# Altium PCB ASCII Terminal.PcbDoc
Units mil, origin at the board's own origin, x right, y up, seen from the top; angles counter-clockwise.
Board outline 4875 x 1475 mil, 2 copper layers (Top Layer, Bottom Layer), stack 61.8 mil thick; 40 components, 35 nets, 192 pads, 62 vias.
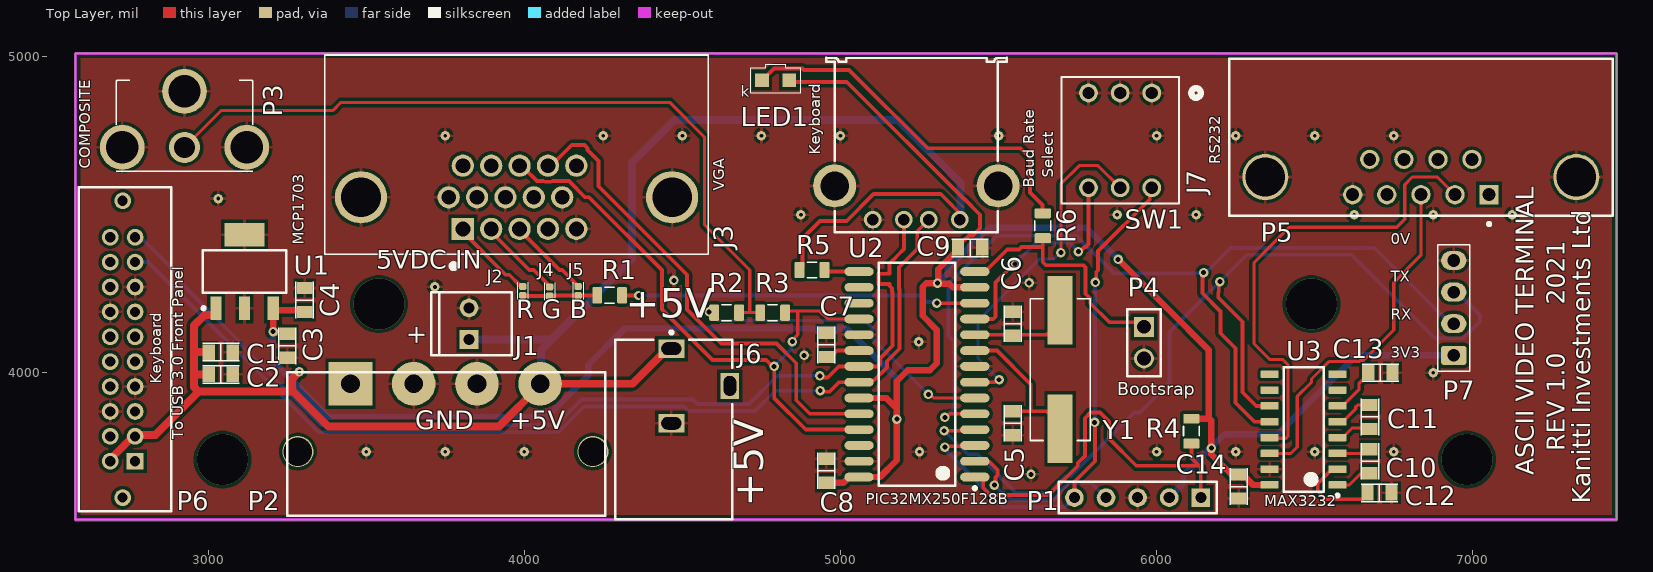
[diagram p0: Top Layer view]
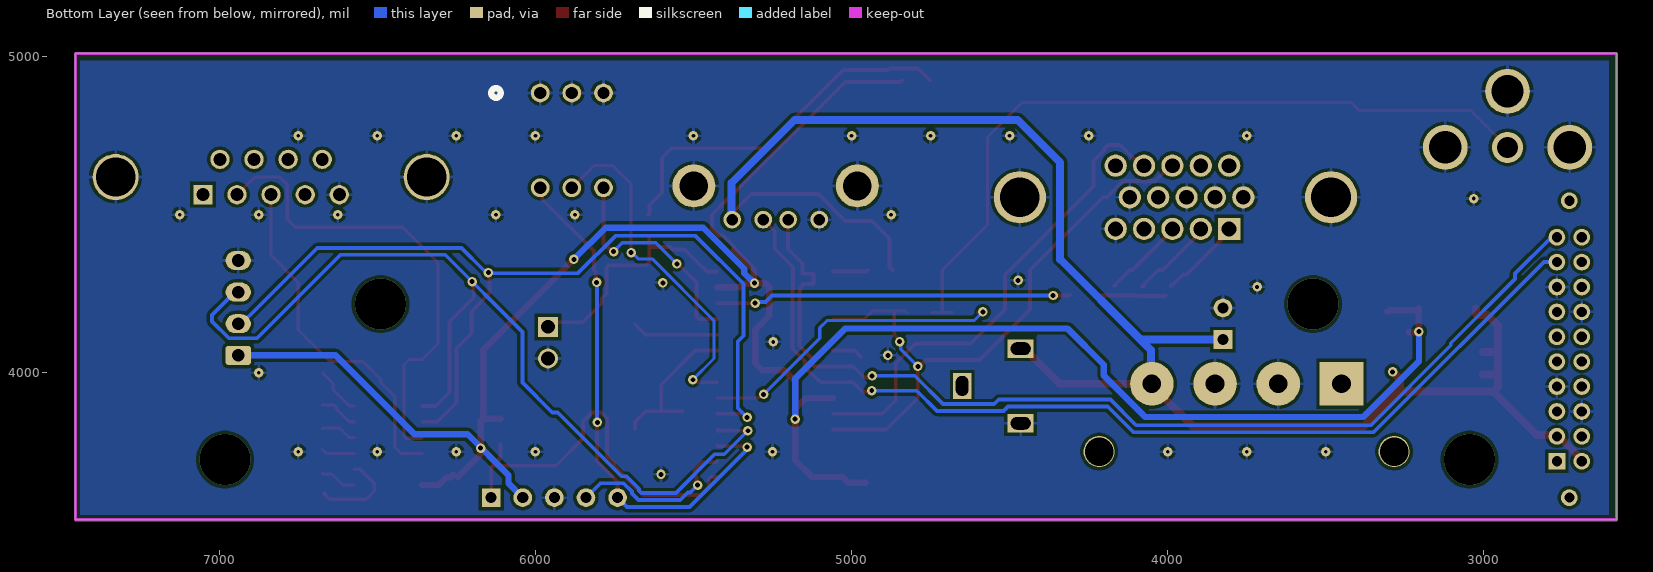
[diagram p1: Bottom Layer view, seen from below]
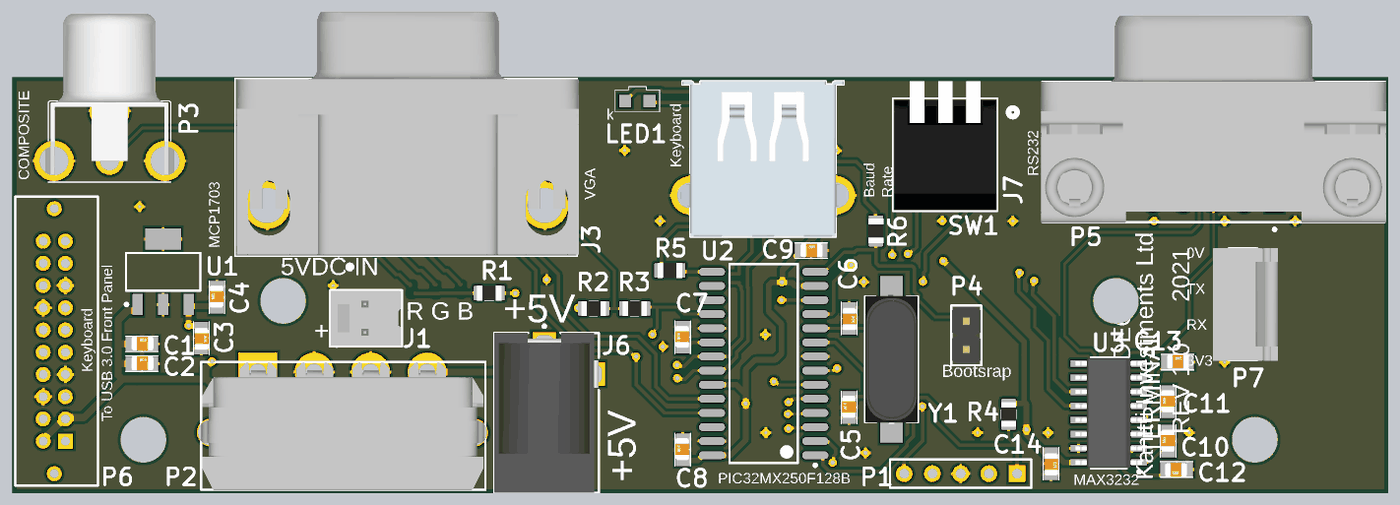
[diagram p2: 3D render of the assembled board from above, using the file's embedded part models]

## Layer stack, top to bottom
Top Solder: solder mask 0.4, Solder Resist, Dk 3.5
Top Layer: signal copper 1.4
Dielectric 1: dielectric 59, FR-4, Dk 4.8
Bottom Layer: signal copper 1.4
Bottom Solder: solder mask 0.4, Solder Resist, Dk 3.5

## Board outline
2580,3535 7455,3535 7455,5010 2580,5010

## Design rules (kind name [scope] priority, off if disabled: settings)
Clearance [All] p1: gap=10 ignorepadtopadclearanceinfootprint=FALSE except(0: Arc-Hole Track-Hole SMDPad-Hole THPad-Hole Via-Hole Fill-Hole Poly-Hole Region-Hole Text-Hole)
PolygonConnect [All] p1: connectstyle=Relief reliefconductorwidth=10 reliefentries=4 polygonreliefangle="90 Angle" airgapwidth=10
RoomDefinition "AScii Terminal" [InComponentClass('AScii Terminal')] p1: confinementstyle=ConfineIn formatcopy=TRUE lockcomponents=FALSE outline 7175,1060 12365,1060 12365,3125 7175,3125
RoutingVias [All] p1: holewidth=28 width=50 viastyle="Through Hole" minholewidth=28 minwidth=50 maxholewidth=28 maxwidth=50
SolderMaskExpansion [All] p1: expansion=4 istentingtop=FALSE
Width [All] p1: maxlimit=100 minlimit=10 preferedwidth=10
30 further rules are at their usual default settings.

## Components (designator, comment, footprint, x,y, rotation, side; value= is the part's Value field where it differs from the comment)
C1 "VJ0805V475ZXQTW1BC" C0805-S 3040,4065 r0 top value=10
C2 "VJ0805V475ZXQTW1BC" C0805-S 3040,3995 r0 top value=0.1
C3 "VJ0805V475ZXQTW1BC" C0805-S 3250,4085 r270 top value=0.1
C4 "VJ0805V475ZXQTW1BC" C0805-S 3305,4230 r90 top value=10
C5 "18p" C0805-S 5545,3840 r90 top
C6 "18p" C0805-S 5545,4155 r270 top
C7 "VJ0805V475ZXQTW1BC" C0805-S 4955,4088 r90 top value=10
C8 "VJ0805V475ZXQTW1BC" C0805-S 4955,3690 r90 top value=0.1
C9 "VJ0805V475ZXQTW1BC" C0805-S 5410,4395 r0 top value=0.1
C10 "VJ0805V475ZXQTW1BC" C0805-S 6675,3720 r90 top value=0.1
C11 "VJ0805V475ZXQTW1BC" C0805-S 6675,3860 r90 top value=0.1
C12 "VJ0805V475ZXQTW1BC" C0805-S 6705,3620 r180 top value=0.1
C13 "VJ0805V475ZXQTW1BC" C0805-S 6708,4000 r0 top value=0.1
C14 "VJ0805V475ZXQTW1BC" C0805-S 6260,3640 r270 top value=0.1
J1 "HDR2" "HDR1X2 - KK" 3825,4105 r90 top
J2 "SOLDER JUMPER" "SOLDER JUMPER" 1151.11,6726.83 r90 top
J3 "2311763-1" TE_1-1734530-1 3975.35,4555 r180 top locked
J4 "SOLDER JUMPER" "SOLDER JUMPER" 1236.11,6725.25 r90 top
J5 "SOLDER JUMPER" "SOLDER JUMPER" 1326.11,6726.83 r90 top
J6 "PJ-102B" CUI-PJ-102B_V 4465,3958.11 r270 top
J7 "61400416021" 61400416021 5240,4720 r180 top
LED1 "LED RED R/A" LTST-S270 4795,4925 r90 top
P1 "Header 5" HDR1X5 6140,3605 r180 top
P2 "Header 2" 1745521 3450,3965 r90 top
P3 "RS153(G)" RCAJ-01X 2925,4890 r0 top
P4 "61300211121" 61300211121 5960,4095 r270 top
P5 "5747840-4" TECO-5747840-4_V 6836.06,4619.09 r180 top
P6 "T2M-110-01-L-D-TH-WT" SMTC-T2M-110-01-X-D-TH-WT 2768.74,3720.04 r90 top
P7 "Programmer" HDR1X4_2.54mmp 6940,4055 r90 top
R1 "150" RESC2012X70N 4270,4245 r0 top
R2 "150" RESC2012X70N 4640,4190 r180 top
R3 "470" RESC2012X70N 4785.63,4190 r0 top
R4 "4K7" RESC2012X70N 6110,3815 r90 top
R5 "4K7" RESC2012X70N 4910,4325 r180 top
R6 "82" RESC2012X70N 5640,4465 r270 top
SW1 "A6FR-3104" SW_A6FR-3104_OMR 5784.69,4585 r270 top
U1 "MCP1703T-3302E/DB" SOT-223-DB3_L 3115,4320 r90 top
U2 "PIC32MX250F128B-I/SO" MCHP-SOIC-SO28_M 5241.93,3995 r180 top locked
U3 "MAX3232EIDR" D0016A_N 6465,3820 r180 top
Y1 "9C-8.000MEEJ-T" XTAL_9C-8.000MEEJ-T 5695,4010 r270 top locked

## Footprints (in the part's own frame and the unit in brackets; to place one, negate y for a bottom-side part, rotate by r counter-clockwise, add the part's x,y. Pads: shape width x height; smd on the part's side, far side on the other; paste and mask are expansions set on the pad)
1745521 [mm] "4PIN RA 5.08 TH CONN DISK DRIVE"
  rect 3.5x3.5 hole 1.5: 1(0,0)
  round 3.5 hole 1.5: 2(0,-5.08) 3(0,-10.16) 4(0,-15.24)
  round 2.5 hole 2.3: ""(-5.45,4.23) ""(-5.45,-19.473)
  silkscreen extent -10.59,-20.49 0.91,5.09, body extent -10.64,-20.4 0.88,5.08, height 9.43
61300211121 [mm] "Pin Header, pitch 2.54 mm, THT, Vertical, single row, 2p"
  rect 1.6x1.6 hole 1.1: 1(-1.27,0)
  round 1.6 hole 1.1: 2(1.27,0)
  silkscreen extent -2.69,-1.35 2.69,1.35, body extent -2.54,-1.27 2.54,1.27, height 8.57
61400416021 [mm] "USB 2.0 Type A Horizontal"
  round 1.42 hole 0.92: 1(-3.5,5.99) 2(-1,5.99) 3(1,5.99) 4(3.5,5.99)
  round 3.45 hole 2.3: Shell(-6.57,3.28) Shell(6.57,3.28)
  silkscreen extent -7.25,-7 7.25,7, body extent -8,-7 8,7, height 7.63
C0805-S [mil]
  rect 39x49 smd: 1(-38,0) 2(38,0)
  silkscreen extent -58,-28 58,28, body extent -37,-24 41,26, height 31
CUI-PJ-102B_V [mm] "THD, 3-Leads, Body 14.4x9mm, Height 11mm"
  rect 1.5x2.1 hole 1 slot 1.6 at 90 deg: 1(-3,0) 2(3,0)
  rect 2.1x1.5 hole 1 slot 1.6 at 0 deg: 3(0,4.7)
  silkscreen extent -4.42,-4.5 10.7,4.9, body extent -3.7,-4.5 10.7,4.9, height 11
D0016A_N [mm] "SOIC, 16-Leads, Body 10x4mm, Pitch 1.27mm, IPC Medium Density"
  rrect17% 1.45x0.6 smd: 1(-2.725,4.445) 2(-2.725,3.175) 3(-2.725,1.905) 4(-2.725,0.635) 5(-2.725,-0.635) 6(-2.725,-1.905) 7(-2.725,-3.175) 8(-2.725,-4.445) 9(2.725,-4.445) 10(2.725,-3.175) 11(2.725,-1.905) 12(2.725,-0.635) 13(2.725,0.635) 14(2.725,1.905) 15(2.725,3.175) 16(2.725,4.445)
  silkscreen extent -2.85,-5 1.6,5.42, body extent -3,-4.95 3,4.95, height 1.59
"HDR1X2 - KK" [mm] "Connector; Header; 2 Position"
  rect 1.5x1.5 hole 0.9: 1(0,0)
  round 1.5 hole 0.9: 2(2.54,0)
  silkscreen extent -1.28,-3.45 3.81,3.05, body extent -1.17,-3.38 3.75,2.97, height 10.68
HDR1X4_2.54mmp [mil] "Connector; Header; 4 Position 0.100\" pitch"
  rrect25% 60x80 hole 40: 1(0,0)
  oval 60x80 hole 40: 2(100,0) 3(200,0) 4(300,0)
  silkscreen extent -50,-50 350,50, body extent -50,-125 350,105, height 395
HDR1X5 [mm] "Connector; Header; 5 Position"
  rect 1.5x1.5 hole 0.9: 1(0,0)
  round 1.5 hole 0.9: 2(2.54,0) 3(5.08,0) 4(7.62,0) 5(10.16,0)
  silkscreen extent -1.27,-1.27 11.43,1.27
LTST-S270 [mm]
  rect 1.1x1.1 smd: A(0,-1.1) K(0,1.1)
  silkscreen extent -1,-2 1.3,2, body extent -0.35,-0.85 0.85,0.85, height 0.6
MCHP-SOIC-SO28_M [mm] "SOIC, 28-Leads, Body 17.9x7.5mm, Pitch 1.27mm, IPC Low Density"
  oval 2.35x0.7 smd: 1(-4.65,8.255) 2(-4.65,6.985) 3(-4.65,5.715) 4(-4.65,4.445) 5(-4.65,3.175) 6(-4.65,1.905) 7(-4.65,0.635) 8(-4.65,-0.635) 9(-4.65,-1.905) 10(-4.65,-3.175) 11(-4.65,-4.445) 12(-4.65,-5.715) 13(-4.65,-6.985) 14(-4.65,-8.255) 15(4.65,-8.255) 16(4.65,-6.985) 17(4.65,-5.715) 18(4.65,-4.445) 19(4.65,-3.175) 20(4.65,-1.905) 21(4.65,-0.635) 22(4.65,0.635) 23(4.65,1.905) 24(4.65,3.175) 25(4.65,4.445) 26(4.65,5.715) 27(4.65,6.985) 28(4.65,8.255)
  silkscreen extent -4.78,-8.95 3.08,9.28, body extent -3.75,-8.95 3.75,8.95, height 2.65
RCAJ-01X [mm]
  round 3.6 hole 2.6: 1(-5,-4.5) 1(0,0) 1(5,-4.5)
  round 2.5 hole 1.7: 2(0,-4.5)
  silkscreen extent -5.5,-6.4 5.5,0.9, body extent -5.8,-5.75 5.8,8.75, height 11.9
RESC2012X70N [mm] "Chip Resistor, Body 2.0x1.2mm, EIA 0805, IPC Medium Density"
  round 0.254 on Mech15: 0(0,0)
  rrect25% 0.8x1.3 smd: 1(-1,0) 2(1,0)
  Top Layer pour cut-out: -0.725,0.65 -0.525,0.85 0.525,0.85 0.725,0.65 0.725,-0.65 0.525,-0.85 -0.525,-0.85 -0.725,-0.65
  silkscreen extent -0.38,-0.63 0.38,0.64, body extent -1.1,-0.67 1.1,0.68, height 0.69
SMTC-T2M-110-01-X-D-TH-WT [mm] "Shrouded Terminal Strip, 2x10 Pins, Vertical, 2mm Pitch, Male"
  rect 1.35x1.35 hole 0.813: 1(0,0)
  round 1.35 hole 0.813: 2(0,2) 3(2,0) 4(2,2) 5(4,0) 6(4,2) 7(6,0) 8(6,2) 9(8,0) 10(8,2) 11(10,0) 12(10,2) 13(12,0) 14(12,2) 15(14,0) 16(14,2) 17(16,0) 18(16,2) 19(18,0) 20(18,2) MH1(-2.925,1) MH2(20.925,1)
  silkscreen extent -4,-2.92 22,4.52
"SOLDER JUMPER" [mm]
  rrect50% 0.55x0.6 smd: 1(-63.06,-72.23) 2(-62.33,-72.23)
  Top Layer pour cut-out: -63.46,-72.54 -63.06,-72.54 -63.06,-71.94 -63.46,-71.94
  silkscreen extent -63.41,-72.64 -61.99,-71.83
SOT-223-DB3_L [mm] "SOT223, 4-Leads, Body 6.5x3.5mm, Pitch 2.3mm, Lead Span 7mm, IPC High Density"
  rect 1.9x0.9 smd: 1(-2.95,2.3) 2(-2.95,0) 3(-2.95,-2.3)
  rect 1.9x3.2 smd: 4(2.95,0)
  silkscreen extent -3.07,-3.35 1.7,3.42, body extent -1.85,-3.35 1.85,3.35, height 1.8
SW_A6FR-3104_OMR [mil]
  round 59.37 hole 39 mask+0: 1(-300,200) 2(-300,100) 3(-300,0) 4(0,0) 5(0,100) 6(0,200)
  silkscreen extent -350,-86 50,355, body extent -410,-80 47,281, height 402
TE_1-1734530-1 [mm]
  rect 1.785x1.785 hole 1.19: 1(4.315,2.54)
  round 1.785 hole 1.19: 2(2.035,2.54) 3(-0.245,2.54) 4(-2.525,2.54) 5(-4.805,2.54) 6(5.455,0) 7(3.175,0) 8(0.895,0) 9(-1.385,0) 10(-3.665,0) 11(4.315,-2.54) 12(2.035,-2.54) 13(-0.245,-2.54) 14(-2.525,-2.54) 15(-4.805,-2.54)
  round 4.196 hole 3.18: SH1(-12.5,0) SH2(12.5,0)
  silkscreen extent -15.4,-11.43 15.4,5.73, body extent -15.56,-17.38 15.24,4.42, height 11.38
TECO-5747840-4_V [mm] "THD, 9-Leads, Body 30.81x18.62mm, Pitch 1.37mm"
  rect 1.55x1.55 hole 1.04: 1(-5.48,1.42)
  round 1.55 hole 1.04: 2(-2.74,1.42) 3(0,1.42) 4(2.74,1.42) 5(5.48,1.42) 6(-4.11,-1.42) 7(-1.37,-1.42) 8(1.37,-1.42) 9(4.11,-1.42)
  round 3.7 hole 3.17: MH1(-12.495,0) MH2(12.495,0)
  silkscreen extent -15.41,-9.52 15.41,3.9, body extent -15.52,-15.42 15.52,3.19, height 12.27
XTAL_9C-8.000MEEJ-T [mm]
  rect 5.5x2 smd: 1(-4.75,0) 2(4.75,0)
  silkscreen extent -5.7,-2.4 5.7,2.4, body extent -5.81,-2.35 5.8,2.35, height 4.2

## Part data
C1 C2 C3 C4 C5 C6 C7 C8 C9 C10 C11 C12 C13 C14: library part CAP, "Capacitor"
  C1 C4 C7: P/N=LMK212ABJ106KG-T
  C2 C3 C8 C9 C10 C11 C12 C13 C14: P/N=UMK212BJ104KG-T
  C5 C6: P/N=VJ0805A180FXXCW1BC
J1: library part Header2P, "Header, 2-pin", P/N=0022232021
J3: library part 2311763-2, "15 Position D-Sub, High Density Receptacle, Female Sockets Connector", Package=None, MF="TE Connectivity", MP=1-1734530-1, P/N=2311763-2, Price=None, SnapEDA_Link=https://www.snapeda.com/parts/1-1734530-1/TE%20Connectivity%20AMP%20Connectors/view-part/289078/?ref=snap, TE_purchase_URL=https://www.te.com/usa-en/product-1-1734530-1.html?te_bu=Cor&te_type=disp&te_campaign=seda_glo_cor-seda-global-disp-prtnr-fy19-seda-model-bom-cta_sma-317_1&elqCampaignId=32493
J6: library part CMP-2000-06900-1, "Through Hole Right Angle DC Power Jack, 2.5 A, 2.5 mm Center Pin, 3 Position, -25 to 85 degC, RoHS, Bulk", Current Rating=2.5A, Flammability Rating=UL94V-0, Insulation Resistance=100MOhms, Manufacturer=CUIInc., Operating Temperature Range=-25Cto+85C, Package Description="3-Pin Through Hole Device, Body 14.4 x 9 mm, Height 11 mm", Voltage Rating=24V, Brand=CUI, Connector Type=DCPowerJack, Contact Gender=Male, Contact Material=Copper, Contact Plating=Nickel, Datasheet URL=http://www.cui.com/product/resource/pj-102b.pdf, Datasheet Version="Rev. 1.03, 04/2016", Factory Pack Quantity=280, Housing Material=PolybutyleneTerephthalate(PBT), Inside Contact Diameter=2.5mm, Manufacturer URL=http://www.cui.com/, Mounting Angle=Right, Mounting Style=ThroughHole, Mounting Technology=ThroughHole, Outside Contact Diameter=6.5mm, P/N=PJ-102B, Package Reference=PJ-102B, Packaging=Bulk, Product=Jacks, Product Category=DCPowerConnectors, RoHS=True, Termination Style=ThroughHole
J7: library part CMP-1502-03227-1, "USB 2.0 Type A Receptacle WR-COM, Horizontal, THT", Contact Resistance=20mOhm, Manufacturer="Wurth Elektronik", Operating Temperature=-40to105degC, Rated Current=1.5A, Working Voltage=30VAC, Connector Type=USB2.0TypeA, Datasheet URL=https://katalog.we-online.de/em/datasheet/61400416021.pdf, Gender=Receptacle, Manufacturer URL=http://www.we-online.de, Mounting Technology=THT, Orientation=Horizontal, P/N=61400416021, Package Reference=61400416021, Packaging=Tray, Part Number=61400416021, Publisher=WurthElektronik
LED1: library part LED_SIDE_1_6_1_15, Supplier Part Number 1=160-1479-1-ND, P/N=LTST-S270KRKT, Supplier 1=Digi-Key
P1: "Header, 5-Pin", LatestRevisionDate=17-Jul-2002, LatestRevisionNote="Re-released for DXP Platform.", Publisher="Altium Limited"
P2: library part "Header 4", "Header, 4-Pin", LatestRevisionDate=17-Jul-2002, LatestRevisionNote="Re-released for DXP Platform.", P/N=174552-1, Publisher="Altium Limited"
P3: library part RCA, "RCA Phono Jack, Right Angle, Thru-Hole, Snap-In", PackageDocument=7-Jul-2000, ComponentLink1Description="Manufacturer Link", ComponentLink1URL=http://www.mouser.com/kobiconn/, DatasheetDocument=7-Jul-2000, DrillAndSlotSize="Corresponds to nominal value.", LatestRevisionDate=15-Jul-2004, LatestRevisionNote="Component Replaced.", P/N=RCJ-014, PackageReference=161, PCB_Layout="Complies with manufacturer's recommendation.", Published=15-Jul-2004, Publisher="Altium Limited"
P4: library part CMP-1712-00002-4, "THT Vertical Pin Header WR-PHD, Pitch 2.54 mm, Single Row, 2 pins", Contact Resistance=20mOhm, Manufacturer="Wurth Elektronik", Operating Temperature=-40to105degC, Rated Current=3A, Withstanding Voltage=500VAC, Working Voltage=250VAC, Datasheet URL=https://katalog.we-online.de/em/datasheet/6130xx11121.pdf, Gender=Male, Manufacturer URL=http://www.we-online.de, Mounting Technology=THT, Orientation=Vertical, P/N=61300211121, Package Reference=61300211121, Packaging=Bag, Part Number=61300211121, Pin Number=2, Pitch=2.54mm, Publisher=WurthElektronik, Row Number=Single
P5: library part CMP-2000-05648-1, "Male D-Sub Connector, Pitch 1.37 mm, 9 Position, Height 12.93 mm, Tail Length 3.55 mm, -55 to 105 degC, RoHS, Tray", Color=Black, Current Rating=6A, Manufacturer="TE Connectivity", Operating Temperature=-55°C~105°C, Package Description="9-Pin Through Hole Device, Body 30.81 x 18.62 mm, Pitch 1.37 mm", Standard Package=130, Voltage Rating=125V, 3D Model=5747840-4.pdf, Catalog Drawings=AMPD-SubMale.318, Category=Connectors,Interconnects, Connector Style=D-Sub, Connector Type=Plug,MalePins, Contact Finish=Gold, Contact Finish Thickness=Flash, Contact Type=Signal, Datasheet URL=http://www.te.com/commerce/DocumentDelivery/DDEController?Action=showdoc&DocId=Customer+Drawing%7F5747840%7FD%7Fpdf%7FEnglish%7FENG_CD_5747840_D.pdf%7F5747840-4, Datasheet Version="Rev. D, 01/2013", Dynamic Catalog=AMPLIMITEHD-20Series, Family=D-SubConnectors, Featured Product=AMPLIMITED-SubminiatureConnectors, Features=BoardLock,GroundStrap,GroundingIndents, Flange Feature=Housing/Shell(4-40), Manufacturer URL=http://www.te.com/, Mating Products="5-747905-7-ND / -CONND-SUBRCPT9POSVERTSLD / 5-787355-1-ND / -CONNRCPT9POSVERTSOLDERCUP / 5746861-4-ND / -CONNRECEPT9POSGOLDIDC / A32510-ND / -CONND-SUBRCPT9POSSLDCUPAU / AFL09B-ND / -CONND-SUBRECEPT9POS30GOLD / A31975-ND / -CONND-SUBRECEPT9P22-26AWGAU / A31974-ND / -CONND-SUBRECEPT9P20-22AWGAU / A31973-ND / -CONND-SUBRECEPT9P26-30AWGAU / A31931-ND / -CONND-SUBRCPT9POS22-26AWGAU", Mounting Technology=ThroughHole, Mounting Type=ThroughHole,RightAngle, Number of Positions=9, Number of Rows=2, Other Names=A32092, P/N=5747840-4, Package Reference=5747840-4, Product Training Modules=AMPLIMITED-SubConnectors, RoHS Information=5747840-4StatementofCompliance, Series=AMPLIMITEHD-20, Shell Material, Finish=Steel,TinPlated, Shell Size, Connector Layout=1(DE,E), Termination=Solder
P6: library part CMP-1029-00094-1, "High Reliability Cable Header, Through-hole, Vertical, -55 to 125 degC, 2 mm Pitch, 20-Pin, Male, RoHS", Manufacturer=Samtec, Temperature Range="-55 to 125 degC", ComponentLink1Description="Manufacturer URL", ComponentLink1URL=http://www.samtec.com, ComponentLink2Description=Datasheet, ComponentLink2URL=http://d2a072wq521u33.cloudfront.net/catalog_english//t2m.pdf, ComponentLink3Description="Package Specification", ComponentLink3URL=http://www.samtec.com/documents/webfiles/cpdf/T2M-1XX-XX-X-D-XX-XX-MKT.pdf, DatasheetVersion=F-214, Mounting Technology=Through-hole, Orientation=Vertical, P/N=T2M-110-01-L-D-TH-WT, PackageDescription="2mm Shrouded Terminal Strip", PackageReference=T2M-110-01-X-D-TH-WT, PackageVersion="V, 3/2009", PartNumber=T2M-110-01-L-D-TH-WT, Pitch="2 mm", RoHS=True
P7: library part Header4P, "Header 4-pin"
R1 R2 R3 R4 R5 R6: library part RES2, "RESISTOR"
  R1 R2: P/N=CRCW0805150RFKEAC
  R3: P/N=CRCW0805470RFKEAC
  R4 R5: P/N=CRCW08054K70FKEAC
  R6: P/N=CRCW080582R0FKEAC
SW1: "No Description Available", Built_By=EMA_Kyle, Copyright="Copyright (C) 2018 Accelerated Designs. All rights reserved", Manufacturer_Part_Number=A6FR-3104, P/N=A6FR-3104, RefDes=RefDes, SourceLibrary=Omron_2019-09-26, Type=DEV, Vendor=Omron
U1: library part CMP-0136-00469-1, "250 mA, 16V, Low Quiescent Current LDO Regulator, 3-Pin SOT-223, Extended Temperature, Tape and Reel", DatasheetVersion="revD, Sep-2009", P/N=MCP1703T-330wE/DB, PackageDescription="3-Lead Plastic Small Outline Transistor (DB) [SOT-223]", PackageReference=SOT-223-DB3, PackageVersion="revBB, Aug-2009"
U2: library part CMP-0048-00457-1, "32-bit Microcontroller with Audio and Graphics Interface, USB and Advanced Analog, 50 MHz, 19 I/O, PMP, -40 to 85 degC, 28-pin SOIC (SO28), Tube", Manufacturer=Microchip, ComponentLink1Description="Manufacturer URL", ComponentLink1URL=http://www.microchip.com, ComponentLink2Description=Datasheet, ComponentLink2URL=http://ww1.microchip.com/downloads/en/DeviceDoc/61168E.pdf, ComponentLink3Description="Package Specification", ComponentLink3URL=http://www.microchip.com/stellent/groups/techpub_sg/documents/packagingspec/en012702.pdf, ComponentLink4Description="Product URL", ComponentLink4URL=http://www.microchip.com/PIC32MX250F128B, DatasheetVersion="Rev. E", Mounting Technology="Surface Mount", P/N=PIC32MX250F128B-I/SL, PackageDescription="28-Lead Plastic Small Outline, 17.9 x 7.5 mm Body, 1.27 mm Pitch", PackageReference=SOIC-SO28, PackageVersion=C04-052C, PartNumber=PIC32MX250F128B-I/SO
U3: library part CMP-0299-00792-2, "3-V to 5.5-V Multichannel RS-232 Line Driver / Receiver with ±15-kV IEC ESD Protection, -40 to 85 degC, 16-Pin SOIC (D), Green (RoHS & no Sb/Br)", Drivers Per Package=2, Supply Voltage(s)(V)="3.3 or 5.0", ComponentLink1Description="Manufacturer URL", ComponentLink1URL=www.ti.com, ComponentLink2Description=Datasheet, ComponentLink2URL=http://www.ti.com/general/docs/lit/getliterature.tsp?genericPartNumber=MAX3232E&fileType=pdf, ComponentLink3Description="Package Specification", ComponentLink3URL=http://www.ti.com/litv/pdf/mpds178g, DatasheetVersion=SLLS664A, ESD HBM(kV)=+/-15, ICC(Max)(mA)=1, IEC-61000-4-2 SUPPORT=TRUE, P/N=MAX3232EIDR, PackageDescription="16-Pin Plastic Small Outline Integrated Circuit, 9.9 x 3.9 mm, Pitch 1.27 mm Pitch", PackageReference=D0016A, PackageVersion="revM, Jun-2011", Receivers Per Package=2, RS-232=TRUE, Single Supply=TRUE, SubFamily=RS-232
Y1: "8MHz Â±10ppm Crystal 18pF 80 Ohms HC-49/US", Package="HC49/US TXC", MF="TXC CORPORATION", MP=9C-8.000MEEJ-T, P/N=9C-8.000MEEJ-T, Price=None, SnapEDA_Link=https://www.snapeda.com/parts/9C-8.000MEEJ-T/TXC%20CORPORATION/view-part/493807/?ref=snap

## Via types
v1: diameter 30, hole 15.75, Top Layer to Bottom Layer, 30 vias
v2: diameter 30, hole 11.81, Top Layer to Bottom Layer, 28 vias
v3: diameter 161.42, hole 161.42, Top Layer to Bottom Layer, 4 vias

## Nets (pads, with @x,y where several pads share a name; then routed paths per layer and width w, separated by ;. In a path a pad name is that pad's centre, name@x,y a point inside that pad or via, vN(x,y) a via of type N, cw(c..) or ccw(c..) an arc to the next point about the centre after c; other vN are vias at no path point)
3V3: C3.1 C4.1 C8.1 C9.1 C14.1 LED1.A P1.2 P7.1 R4.2 U1.3 U2.13 U2.23 U2.28 U3.16 | length 7768.2
  Top Layer w12: LED1.A 4843.31,4920 5020,4920 5390.7,4549.3 5391.97,4549.3 5441.75,4499.52 5441.75,4456.75 5419.25,4434.25 5406.25,4434.25 5372,4400 C9.1 C9.1@5372,4390
  Top Layer w20: C3.1@3237.91,4128.09 3206.91,4128.09 v1(3205,4130) 3205.28,4130.28 3205.28,4203.58 U1.3 3211.41,4198 3299,4198 C4.1 ; C8.1 5009.5,3652 5027.5,3670 U2.28 5125,3670 5178.42,3723.42 v1(5178.42,3853.52) 5178.42,3886.58 ; U2.23 5145,3920 5178.42,3886.58 ; C9.1@5372,4390 5308.85,4326.85 5308.85,4285.09 v1(5306.93,4283.17) ; U2.13 5355,4270 5343.74,4281.26 5308.85,4281.26 v1(5306.93,4283.17) ; v1(5878.42,4358.52) 6031.94,4205 6165,4071.94 6165,3854.37 ; R4.2 6168.13,3854.37 6172.5,3850 6172.5,3761.5 6172.5,3742.5 C14.1@6246,3669 ; C14.1 6269.5,3668.5 6281.5,3668.5 6305,3645 U3.16 ; 5178.42,3886.58 5178.42,3973.42 5213,4008 5283,4008 5305,4030 5305,4135 5260,4180 5260,4271.46 5271.72,4283.17 v1(5306.93,4283.17)
  Bottom Layer w20: v1(3205,4130) 3205,4036.77 3381.77,3860 4070.72,3860 4201.77,3991.05 4201.77,4025.05 4316.72,4140 5020,4140 5178.42,3981.58 v1(5178.42,3853.52) ; v1(5306.93,4283.17) 5338.95,4315.18 5338.95,4328.95 5469,4459 5777.94,4459 v1(5878.42,4358.52) ; P1.2 6085,3650 6085,3675.39 6214.61,3805 6382.28,3805 6632.28,4055 P7.1
  other v1: 6173.52,3761.5
BL: P4.1 R6.2 U2.14 | length 789.6
  Top Layer w12: U2.14 5457.48,4320 5483.5,4346.02 5527.48,4390 5565.3,4390 5572.65,4397.35 5640,4397.35 ; R6.2@5640,4430 5640,4397.35 ; P4.1 5945,4160 5850,4160 5790,4220 5790,4235 5775.38,4249.62 5775.38,4332.97 5768.35,4340 5650,4340 5640,4350 5640,4397.35
COMP: P3.2 R2.1 R3.1 | length 2430.5
  Top Layer w10: P3.2 3042.17,4830 3395,4830 3420,4855 4460,4855 4570,4745 4570,4467.81 4712.81,4325 4712.81,4190 ; R2.1 4712.81,4190 ; R3.1 4712.81,4190
D_MINUS: J7.2 P6.17 U2.22 | length 3228
  Top Layer w12: v1@4945,3940 4955,3940 ; 4955.03,3939.97 4964.97,3939.97 4995,3970 U2.22 5095.55,3970 5101.69,3976.14 5106.14,3976.14 5147,4017 5147,4036.04 5187,4076.04 5187,4263 5185,4265 5185,4275 5185,4333.89 5242.77,4391.66 5242.77,4447.58 J7.2 ; J7.2@5289.37,4474.17 J7.2@5299.37,4484.17
  Bottom Layer w12: P6.17 2810.04,4349.96 3348,3812 4108.77,3812 4189.77,3893 4505.49,3893 4519.72,3878.77 4729.31,3878.77 4793.73,3943.19 v1(4936.03,3943.19)
D_PLUS: J7.3 P6.19 U2.21 | length 3276.3
  Top Layer w12: v1@4935,3985 4959.6,3985 4994.6,4020 U2.21 5117.97,4020 5125,4027.03 5125,4045.15 5165,4085.15 5165,4253.89 5163,4255.89 5163,4267.03 5155.03,4275 5155.03,4281 5120.62,4281 5120.62,4313 5155.03,4313 5155.03,4325 5155.03,4344.97 5159.41,4349.35 5165.03,4354.97 5170.65,4360.59 5176.26,4366.21 5181.47,4371.41 5201.05,4390.99 5201.05,4483.75 J7.3
  Bottom Layer w12: P6.19 2776.61,4420.83 2794.17,4420.83 2901.22,4313.78 2901.22,4296.22 3104.32,4093.12 3104.32,4086.8 3357.11,3834 4099.66,3834 4180.66,3915 4534.38,3915 4548.6,3900.77 4710.77,3900.77 4800.27,3990.27 v1(4934.88,3990.27)
GND: C1.2 C2.2 C3.2 C4.2 C5.1 C6.1 C7.2 C8.2 C9.2 C12.1 C13.2 C14.2 J1.2 J3.5 J3.6 J3.7 J3.8 J3.10 J3.SH1 J3.SH2 J6.2 J7.4 J7.Shell P1.3 P2.2 P2.3 P3.1 P4.2 P5.5 P5.MH1 P5.MH2 P6.6 P6.7 P6.14 P6.15 P7.4 SW1.1 SW1.2 SW1.3 U1.2 U1.4 U2.8 U2.19 U2.27 U3.15
  other v1: 5602.69,3678.41 4885,4055 5596.76,4284.34 4473.27,4292.32
  other v2: 3500,3750 3750,3750 4000,3750 5250,3750 6000,3750 6250,3750 6500,3750 6750,3750 6875,4000 5248,4097.48 3717.04,4271.47 4875,4500 5875,4500 6125,4500 6625,4500 6875,4500 7125,4500 3031.79,4550.96 3750,4750 4250,4750 4500,4750 4750,4750 5000,4750 5500,4750 6000,4750 6250,4750 6500,4750 6750,4750
HSYNC: J3.13 R3.2 U2.18 U2.25 | length 2000
  Top Layer w10: R3.2 4830,4195 4865,4195 ; v1(4848.21,4098.53) 4848.21,4103.95 4865,4120.73 4865,4195 ; U2.18 4960,4170 4935,4195 4865,4195
  Top Layer w12: J3.13@3985.24,4645 4001.01,4645 4036.41,4609.6 4039.93,4606.08 4059.87,4606.08 ccw(c4074.76,4655) 4089.66,4606.08 4098.41,4606.08 4098.46,4606.14 4140.83,4606.14 4191.97,4555 4205,4555 4435,4325 4435,4200 4595,4040 4765.39,4040 4785.39,4020 v1(4790.26,4020) 4790.26,3919.74 4890,3820 U2.25
  Bottom Layer w10: v1(4790.26,4020) 4844.39,4074.13 4844.39,4094.71 v1(4848.21,4098.53)
MCLR: P1.1 R4.1 U2.1 | length 1215.6
  Top Layer w12: U2.1 5444.29,3670 5451.48,3662.81 5451.48,3635.84 5473.84,3613.48 5658.48,3613.48 5750.37,3705.37 5750.37,3714.23 5773.18,3737.04 5773.18,3856.06 5791.34,3874.22 5820.78,3874.22 5849,3846 5849,3792.44 5935.72,3705.72 6134.28,3705.72 ; R4.1 6110,3730 6134.28,3705.72 ; P1.1 6140,3700 6134.28,3705.72
NetC5_2: C5.2 U2.9 Y1.2 | length 491.6
  Top Layer w12: U2.9 5495,4070 5601.63,3963.37 5601.63,3878 ; C5.2@5535,3878 5601.63,3878 ; Y1.2@5685,3822.99 5685,3844.63 5651.63,3878 5601.63,3878
NetC6_2: C6.2 U2.10 Y1.1 | length 273.8
  Top Layer w12: U2.10 5545,4120 5651.63,4120 Y1.1@5685,4153.37
NetC7_1: C7.1 U2.20 | length 97.1
  Top Layer w12: C7.1@4970,4050 4990,4070 U2.20
NetC10_1: C10.1 U3.1 | length 118
  Top Layer w10: U3.1 6610,3645 6645,3680 6673,3680 C10.1
NetC10_2: C10.2 U3.3 | length 108.1
  Top Layer w10: U3.3 6662,3745 C10.2
NetC11_1: C11.1 U3.4 | length 116.4
  Top Layer w10: U3.4 6589.02,3795 6619.02,3825 6672,3825 C11.1
NetC11_2: C11.2 U3.5 | length 128.3
  Top Layer w10: U3.5 6589.02,3845 6630,3885.98 6630,3892.14 6635.86,3898 C11.2
NetC12_2: C12.2 U3.2 | length 284.2
  Top Layer w12: U3.2 6555.55,3695 6510,3649.45 6510,3625 6535,3600 6647,3600 6648.5,3601.5 6653.5,3601.5 6667,3615 C12.2
NetC13_1: C13.1 U3.6 | length 155.3
  Top Layer w10: U3.6 6589.02,3895 6640,3945.98 6640,3965 6670,3995 C13.1
NetJ2_1: J2.1 J4.1 J5.1 R1.1 | length 224.9
  Top Layer w12: 4007.01,4244.15 4008.59,4242.58 4080,4242.58 4092.01,4242.58 4093.59,4244.15 4170,4244.15 R1.1@4230.63,4244.15
NetJ2_2: J2.2 J3.1 | length 259.1
  Top Layer w12: J3.1@3805.71,4445 3940.71,4310 3952.25,4310 3984.53,4277.72 3989,4277.72 3990.43,4276.29 J2.2@3990.43,4271.83
NetJ3_2: J3.2 J4.2 | length 259.6
  Top Layer w12: J3.2@3895.47,4445 4015.47,4325 4030,4325 4074,4281 4074,4276.14 4076.39,4273.75 J4.2@4081.25,4273.75
NetJ3_3: J3.3 J5.2 | length 257.1
  Top Layer w12: J3.3@3985.24,4445 3990.88,4445 4110.88,4325 4120,4325 4164,4281 4164,4277.72 4166.72,4275 J5.2@4170,4275
NetLED1_K: LED1.K R6.1 | length 1180.7
  Top Layer w12: LED1.K 4789.35,4962.65 4880.32,4962.65 4885,4957.97 5027.03,4957.97 5275,4710 5570,4710 5600,4680 5600,4570 5638.91,4531.09 5638.91,4503.16 R6.1@5643.69,4498.39
NetP5_2: P5.2 U3.13 | length 1514.8
  Top Layer w10: U3.13 6359.79,3792.93 6409.58,3792.93 6415.44,3798.79 6415.44,4025.95 6399.58,4041.81 6358.19,4041.81 6308,4092 6308,4348 6360,4400 6420,4460 6760,4460 6785,4485 6785,4595 6809.09,4619.09 6888.03,4619.09 P5.2
NetP5_3: P5.3 U3.14 | length 1117.2
  Top Layer w10: U3.14 6425,3745 6445,3765 6445,3925 6490,3970 6490,3980 6545,4035 6639.79,4035 6644.29,4039.5 6654.5,4039.5 6750,4135 6750,4285 6836.06,4371.06 P5.3
NetR2_2: R2.2 U2.6 | length 989
  Top Layer w10: v1(4584.82,4192.24) 4587.06,4190 R2.2 ; v1@5280.88,3934.12 5295,3920 U2.6
  Bottom Layer w10: v1(4584.82,4192.24) 4611.98,4165.08 5077.28,4165.08 5100.62,4141.74 5100.62,4109.08 v1(5278.22,3931.47) ; v1@5278.22,3930 v1@5280,3930
NetR5_1: R5.1 U2.15 | length 111.6
  Top Layer w12: R5.1 4954.37,4320 U2.15
NetSW1_4: SW1.4 U2.11 | length 712.5
  Top Layer w12: U2.11 5482.97,4170 5490,4177.03 5490,4285 v1@5545,4340 ; v1(5752.66,4383.41) 5757.53,4383.41 5772.18,4398.06 5776.2,4398.06 5784.69,4406.54 SW1.4
  Bottom Layer w12: v1(5552.76,4344.65) 5619.11,4411 5725.07,4411 v1(5752.66,4383.41)
NetSW1_5: SW1.5 U2.7 | length 1104.6
  Top Layer w10: U2.7 5489.02,3970 5496.78,3977.76 v1(5502.19,3977.76) ; v1(5697.57,4380) 5697.57,4597.57 5755,4655 5814.69,4655 SW1.5
  Bottom Layer w10: v1(5502.19,3977.76) 5435,4044.95 5435,4165 5630,4360 5675.15,4360 5695.15,4380 v1(5697.57,4380)
PGC: P1.5 SW1.6 U2.3 | length 1684.6
  Top Layer w12: v1(5330,3764.75) 5332.62,3767.38 5422.38,3767.38 U2.3 ; P1.5 5740,3655 5805,3720 5805,3842.39 v1(5804.18,3843.22) ; v1(5806.38,4285.72) 5809,4288.34 5809,4318.72 5815,4324.72 5815,4385 5978.12,4548.12 5978.12,4578.44 SW1.6
  Bottom Layer w12: v1(5330,3764.75) 5333.44,3761.31 5333.44,3753.87 5512.32,3575 5710,3575 P1.5 ; v1(5804.18,3843.22) 5805.28,3844.32 5805.28,4284.61 v1(5806.38,4285.72)
PGD: P1.4 U2.2 | length 553.9
  Top Layer w12: U2.2 5427.98,3717.02 5472.63,3717.02 5497.76,3691.89 5497.76,3676.4 5490.12,3668.76 5490.12,3647.92 v1(5486.68,3644.48)
  Bottom Layer w12: v1(5486.68,3644.48) 5510.32,3620.84 5518.19,3620.84 5542.03,3597 5673.56,3597 5694.47,3617.92 5694.47,3623.86 5721.14,3650.53 5794.47,3650.53 P1.4
RX: P7.2 U2.5 U3.12 | length 3012.7
  Top Layer w12: v1(5330,3858.41) 5334.87,3858.41 5346.46,3870 U2.5 ; v1@6145,4320 6145,4251.18 6202.36,4193.82 6202.36,4125 6250,4077.36 6250,3905 6310,3845 U3.12 ; P7.2@6912.36,4155 P7.2 P7.2@6952.36,4155
  Bottom Layer w12: v1(5330,3858.41) 5360,3888.41 5360,4098.97 5341.73,4117.23 5341.73,4281.2 5493.53,4433 5746.91,4433 5864.91,4315 6135,4315 v1@6142.51,4322.51 ; v1(6148.52,4316.5) 6153.39,4316.5 6161.2,4324.32 6163.37,4324.32 6234.04,4395 6690,4395 6930,4155 P7.2
TX: P7.3 U2.4 U3.11 | length 3034.9
  Top Layer w12: v1(5328.22,3816.47) 5377.99,3816.47 5378.54,3817.02 5422.02,3817.02 U2.4 ; v1(6200,4288) 6196.56,4284.56 6196.56,4255.69 6195,4254.13 6195,4238 6272,4161 6272,3938 6315,3895 U3.11
  Bottom Layer w12: v1(5328.22,3816.47) 5402.78,3741.92 5433.08,3741.92 5555,3620 5665.44,3620 5672.47,3627.03 5672.47,3632.97 5712.03,3672.53 5727.53,3672.53 5929.29,3874.29 5946.71,3874.29 6041,3968.57 6041,4129 6285,4373 6617,4373 6881,4109 6969.05,4109 7022.56,4162.5 7022.56,4182.44 6950,4255 P7.3
VCC: C1.1 C2.1 J1.1 J6.1 J7.1 P2.4 P6.2 P6.3 R5.2 U1.1 | length 5603.6
  Top Layer w12: R5.2 4880,4334.37 4880,4425 4935,4480 5020,4480 5105,4565 5316.97,4565 J7.1@5397.8,4484.17
  Top Layer w25: P6.2 2690,3726.27 2762.51,3798.78 P6.3 2773.13,3803.17 2832.82,3803.17 2969.64,3940 ; C2.1 2955,3995 ; C1.1 2955,4065 ; U1.1 3024.45,4187.4 3019.23,4182.18 2987.97,4182.18 2955,4149.21 2955,4065 ; v1(3288.59,4002.68) 3287.68,4002.68 3265,3980 3265,3940 ; J6.1 4453.19,4076.22 4341.97,3965 P2.4 4050,3960 3920,3830 3380,3830 3270,3940 3265,3940 ; 2955,3995 2955,3954.64 2969.64,3940 ; 2955,3995 2955,4065 ; 2969.64,3940 3265,3940
  Bottom Layer w25: J1.1@3815,4105 4086.26,4105 ; P2.4 4052.66,3967.66 4052.66,4071.4 4086.26,4105 ; J7.1 5379.17,4485.55 5379.17,4600.83 5180,4800 4475,4800 4340,4665 4340,4358.74 4086.26,4105
VGA: R1.2 U2.12 | length 1126
  Top Layer w12: R1.2 4310.08,4244.29 v1(4362.38,4244.29) ; v1(5305,4220) U2.12
  Bottom Layer w12: v1(4362.38,4244.29) 5251.15,4244.29 5272,4223.44 5301.56,4223.44 v1(5305,4220)
VSYNC: J3.14 U2.24 | length 1549.7
  Top Layer w12: J3.14@4075,4645 4150,4720 4190,4720 4200,4710 4200,4705 4235,4670 4235,4590 4515,4310 4515,4200 4623,4092 4798,4092 4860,4030 4860,3913.07 4903.07,3870 U2.24
pads on no net: J3.4 J3.9 J3.11 J3.12 J3.15 J6.3 P2. P2.1 P5.1 P5.4 P5.6 P5.7 P5.8 P5.9 P6.1 P6.4 P6.5 P6.8 P6.9 P6.10 P6.11 P6.12 P6.13 P6.16 P6.18 P6.20 P6.MH1 P6.MH2 R1.0 R2.0 R3.0 R4.0 R5.0 R6.0 U2.16 U2.17 U2.26 U3.7 U3.8 U3.9 U3.10
copper on no net:
  other v3: 3045,3725 6982,3725 3540,4217 6490,4217

## Polygon pours and split planes (outlines as drawn)
GND on Bottom Layer "GND_L02_P001" (solid, pour order 1): 7455,4987.5 7455,3545 2605,3545 2605,4987.5
GND on Top Layer "GND_L01_P000" (solid, pour order 0): 2597.06,4995 7440,4995 7440,3550 2597.06,3550

## Keep-outs
Keep-Out Layer:
  the board outline again, w10

## Silkscreen, mask and mechanical layers (free items; w line width, h text height)
Top Overlay:
  text "k" at 4685,4860 h60
  text "Keyboard" at 4948.75,4690 h60 r90
  text "RS232" at 6214.31,4660 h60 r90
  text "COMPOSITE" at 2639.36,4645 h60 r90
  text "Baud Rate /   Select" at 5685,4585 h60 r90
  text "VGA" at 4644.36,4575.03 h60 r90
  text "MCP1703" at 3314.31,4405 h60 r90
  text "5VDC IN" at 3531.07,4308.77 h100
  text "R G B" at 3975,4151.06 h100
  text "+5V" at 4320,4141.7 h160
  text "+" at 3705.3,4085 h100 r90
  text "0V /  / TX /  / RX /  / 3V3" at 6741,4034.5 h60
  text "Keyboard" at 2863.75,3965 h60 r90
  text "Bootsrap" at 5875,3915 h70
  text "GND" at 3655,3801.06 h100
  text "+5V" at 3955,3801.06 h100
  text "To USB 3.0 Front Panel" at 2934.31,3790 h60 r90
  text "ASCII VIDEO TERMINAL /    REV 1.0      2021" at 7310,3675 h98.43 r90
  text "Kanitti Investments Ltd" at 7390,3585 h98.43 r90
  text "+5V" at 4788.14,3575.38 h160 r90
  text "PIC32MX250F128B" at 5080,3570.69 h60
  text "MAX3232" at 6340,3565.69 h60

## Text inside footprints (layer, text, board x,y; h text height)
LED1: Mechanical 1 "K" at 4751.69,4921.06 h23.62 r90; Mechanical 1 "A" at 4850.12,4921.06 h23.62 r90
SW1: Mechanical 7 "0.3in/7.62mm" at 6246.54,4810 h25 r270; Mechanical 7 "0.1in/2.54mm" at 5922.19,4356.49 h25 r270; Mechanical 7 "0.361in/9.18mm" at 5872.19,4162.86 h25 r270; Mechanical 7 "0.39in/9.9mm" at 6332.83,4810 h25 r270